# Altium PCB Noise_Gate_PCB.PcbDoc
Units mil, origin at the board's own origin, x right, y up, seen from the top; angles counter-clockwise.
Board outline 6000 x 4000 mil, 2 copper layers (Top Layer, Bottom Layer); 48 components, 26 nets, 146 pads, 2 vias.
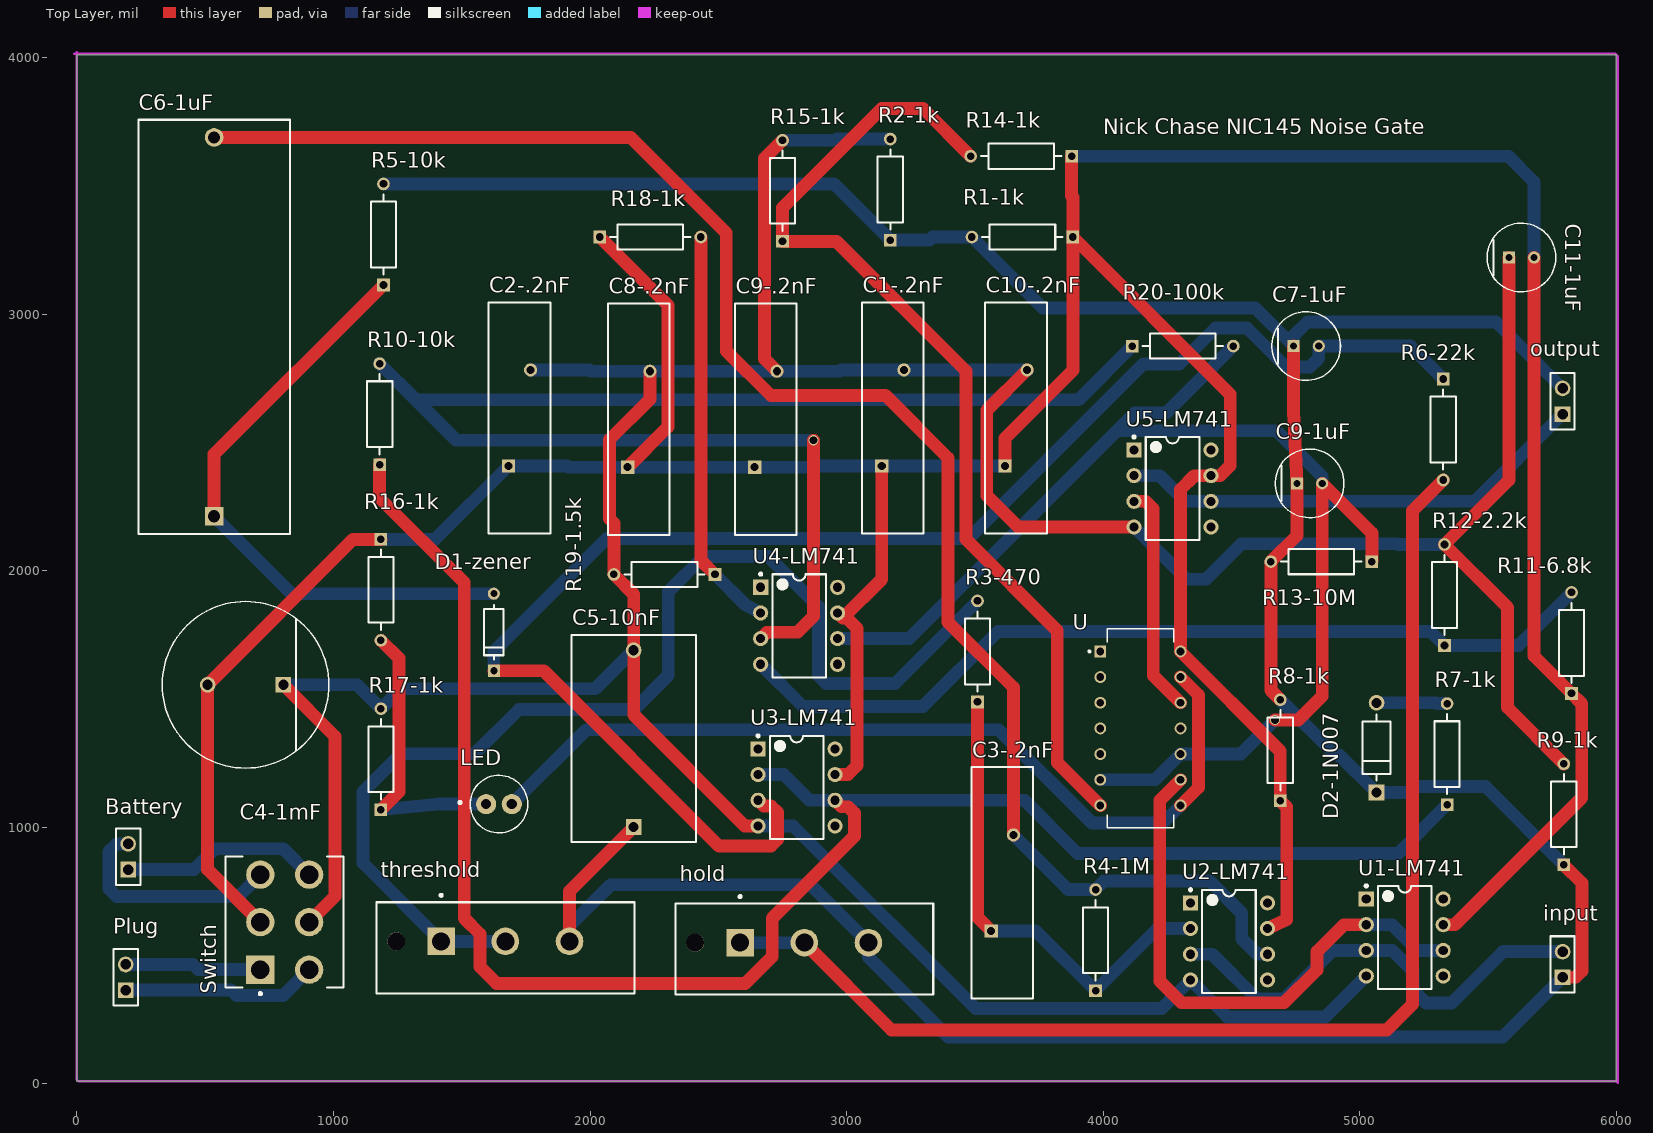
[diagram p0: Top Layer view]
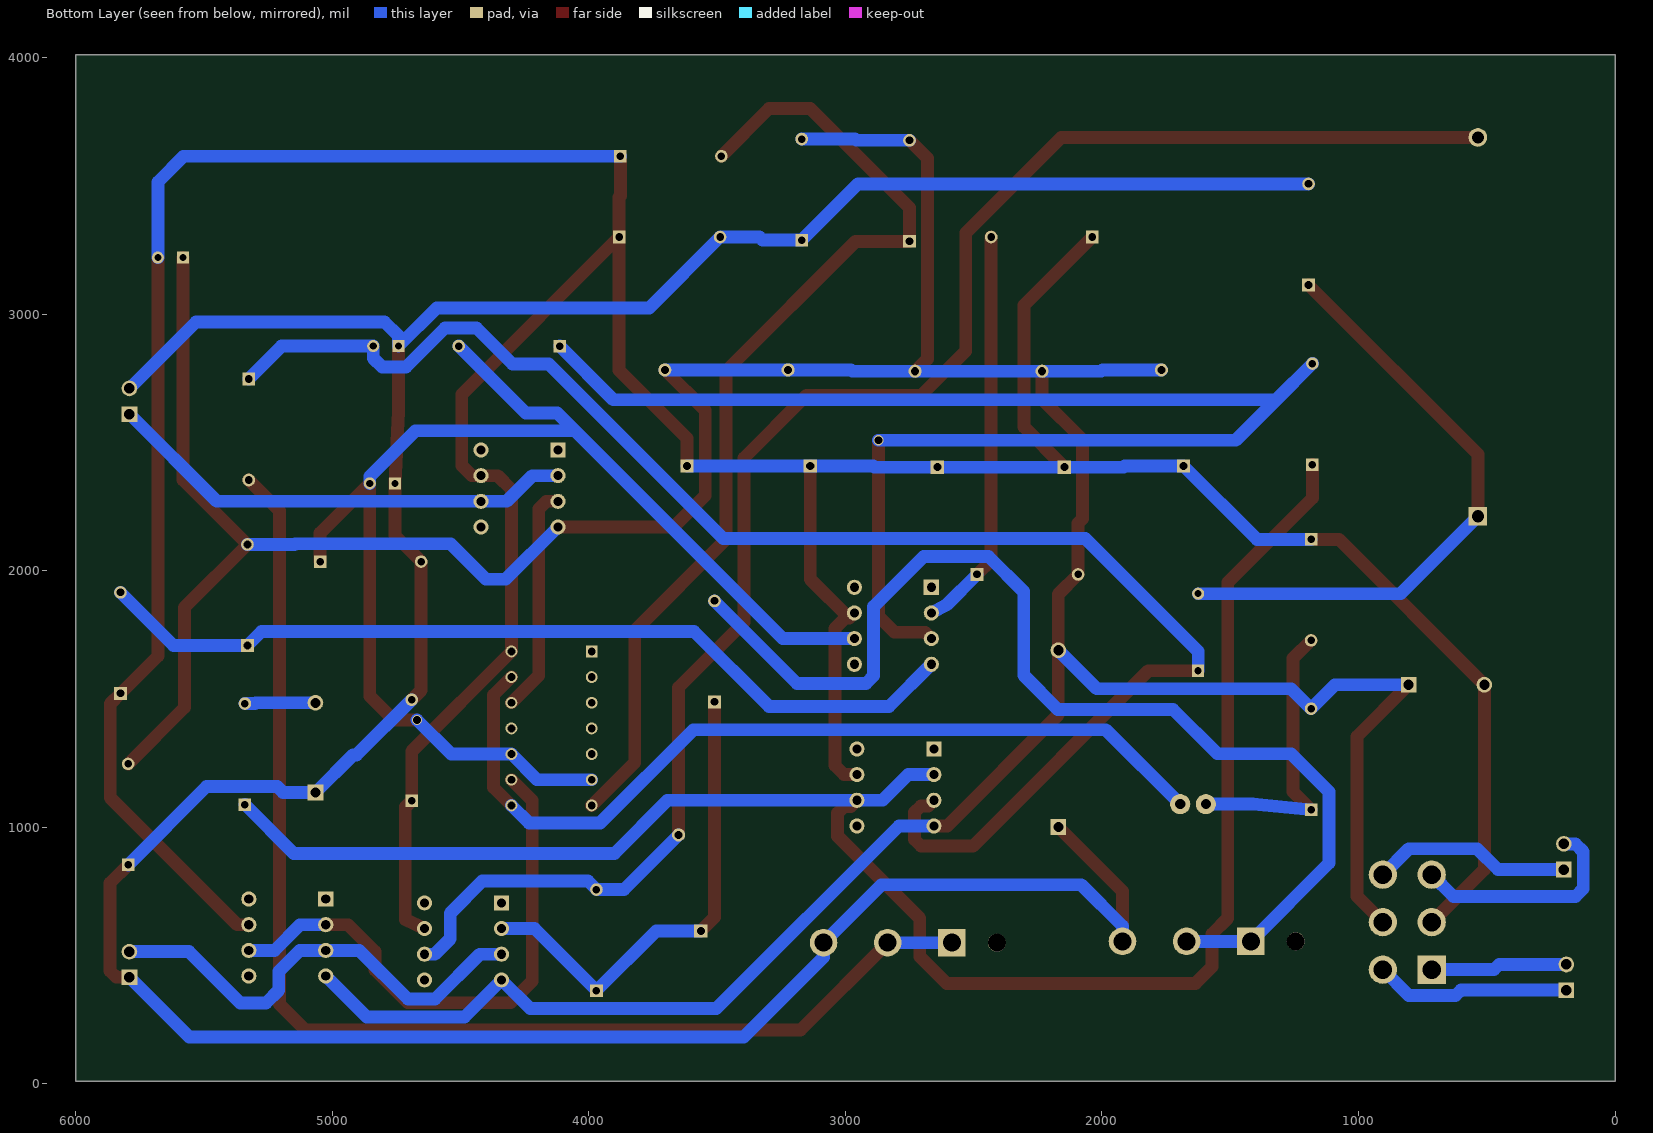
[diagram p1: Bottom Layer view, seen from below]
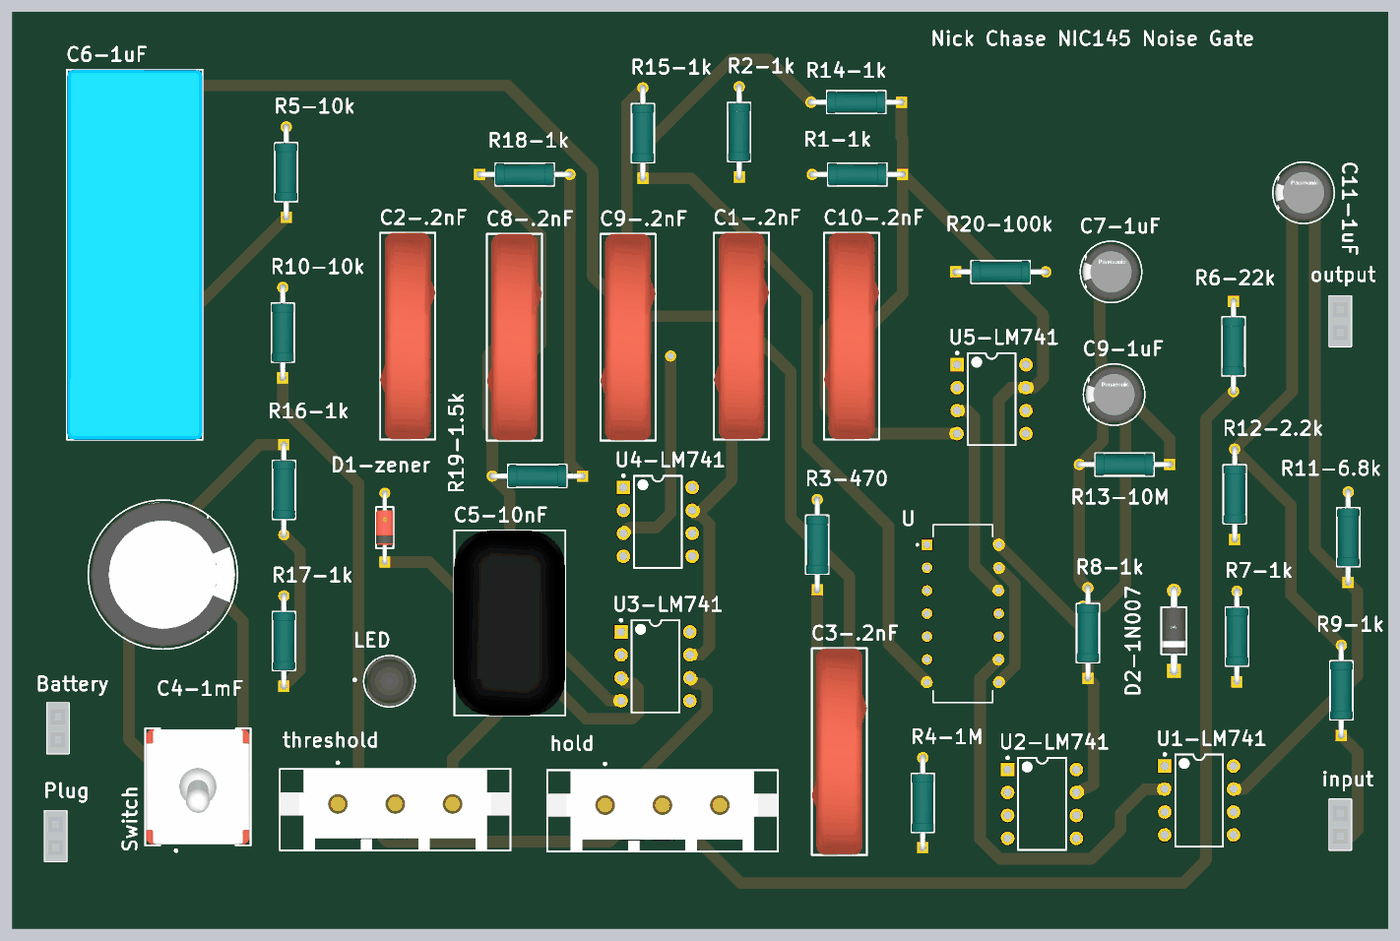
[diagram p2: 3D render of the assembled board from above, using the file's embedded part models]

## Layer stack, top to bottom
Top Solder: solder mask 0.4, Solder Resist, Dk 3.5
Top Layer: signal copper 1.4
Dielectric 1: dielectric 12.6, FR-4, Dk 4.8
Bottom Layer: signal copper 1.4
Bottom Solder: solder mask 0.4, Solder Resist, Dk 3.5

## Board outline
0,10 6000,10 6000,4010 0,4010

## Design rules (kind name [scope] priority, off if disabled: settings)
BoardOutlineClearance [All] p1: gap=7.87 ignorepadtopadclearanceinfootprint=FALSE except(15.75: Arc-SplitBarrior Arc-SplitContinuation Track-SplitBarrior Track-SplitContinuation SMDPad-SplitBarrior SMDPad-SplitContinuation THPad-SplitBarrior THPad-SplitContinuation Via-SplitBarrior Via-SplitContinuation Fill-SplitBarrior Fill-SplitContinuation Poly-SplitBarrior Poly-SplitContinuation Region-SplitBarrior Region-SplitContinuation Text-SplitBarrior Text-SplitContinuation)
Clearance "Clearance Bottom Layer" [OnLayer('Bottom Layer')] p1: gap=8 ignorepadtopadclearanceinfootprint=TRUE except(10: Arc-Text Track-Text SMDPad-Text THPad-Text Via-Text Fill-Text Poly-Text Region-Text Text-Text)
Clearance "Clearance Top Layer" [OnLayer('Top Layer')] p2: gap=8 ignorepadtopadclearanceinfootprint=TRUE except(10: Arc-Text Track-Text SMDPad-Text THPad-Text Via-Text Fill-Text Poly-Text Region-Text Text-Text)
Clearance [All] p3: gap=7.87 ignorepadtopadclearanceinfootprint=FALSE except(3.5: Arc-Arc Arc-Track Arc-SMDPad Track-Track Track-SMDPad SMDPad-SMDPad; 5: Arc-Via Track-Via SMDPad-Via THPad-Via Via-Via; 10: Arc-Text Track-Text SMDPad-Text THPad-Text Via-Text Fill-Text Poly-Text Region-Text Text-Text)
HoleSize [All] p1: absolutevalues=TRUE maxlimit=248.03 minlimit=7.87 maxpercent=80.000 minpercent=20.000
MinimumAnnularRing [All] p1: minimumring=3
MinimumSolderMaskSliver [All] p1: minsoldermaskwidth=3.94
PolygonConnect PolygonConnect_1 [All] p1: thpad.connectstyle=Relief thpad.reliefconductorwidth=20 thpad.reliefentries=4 thpad.polygonreliefangle="90 Angle" thpad.airgapwidth=10 smdpad.connectstyle=Relief smdpad.reliefconductorwidth=20 smdpad.reliefentries=4 smdpad.polygonreliefangle="90 Angle" smdpad.airgapwidth=10 via.connectstyle=Direct via.reliefconductorwidth=20 via.reliefentries=4 via.polygonreliefangle="90 Angle" via.airgapwidth=10
RoutingCorners [All] p1: cornerstyle=Round minsetback=100 maxsetback=100
RoutingVias [All] p1: holewidth=19.68 width=39.37 viastyle="Through Hole" minholewidth=7.87 minwidth=17.72 maxholewidth=39.37 maxwidth=78.74
SilkToSilkClearance [All] p1: silktosilkclearance=3.94
SilkToSolderMaskClearance [IsPad] p1: minsilkscreentomaskgap=3.94 clearancetoexposedcopper=TRUE
SolderMaskExpansion [All] p1: expansion=4 istentingtop=FALSE
Width [All] p1: maxlimit=100 minlimit=3.5 preferedwidth=15
25 further rules are at their usual default settings.

## Components (designator, comment, footprint, x,y, rotation, side; value= is the part's Value field where it differs from the comment)
Battery "9V-Power" SMTC-SSW-102-02-X-S 200,835 r90 top
C1-.2nF "" FP-565R30GASS33-MFG 3180,2595 r90 top
C2-.2nF "" FP-565R30GASS33-MFG 1725,2595 r90 top
C3-.2nF "" FP-565R30GASS33-MFG 3606.69,782.99 r90 top
C4-1mF "EEUFC1V102SB" FP-RAD-TH-D_16_0_5-L_20_2-MFG 657.36,1555 r180 top
C5-10nF "ECWF4754JL" FP-ECWF4754JL-MFG 2170,1345 r90 top value=0.75uF
C6-1uF "PHE844RR7100MR06L2" FP-PHE844RR7100MR06L2-MFG 535,2950 r90 top
C7-1uF "ECA-2CHG010I" FP-ECA-2CHG010I-MFG 4790.79,2875 r0 top
C8-.2nF "" FP-565R30GASS33-MFG 2190,2590 r90 top
C9-1uF "ECA-2CHG010I" FP-ECA-2CHG010I-MFG 4804.21,2340 r0 top
C9-.2nF "" FP-565R30GASS33-MFG 2685,2590 r90 top
C10-.2nF "" FP-565R30GASS33-MFG 3660,2595 r90 top
C11-1uF "ECA-2CHG010I" FP-ECA-2CHG010I-MFG 5630,3220 r0 top
D1-zener "1N5242BTR" FP-017AG-MFG 1625,1759.88 r90 top
D2-1N007 "1N4007" FP-1N4007-MFG 5065,1310 r90 top value=15pF
hold "" FP-641966-1-MFG 2835,525 r0 top
input "in" SMTC-SSW-102-02-X-S 5790,415 r90 top
LED "SFH 4554" FP-SFH_4554-MFG 1645,1090 r0 top
output "out" SMTC-SSW-102-02-X-S 5790,2610 r90 top
Plug "9V-Power" SMTC-SSW-102-02-X-S 190,365 r90 top
R1-1k "R1" FP-MRS25-MFG 3685,3300 r180 top
R2-1k "R2" FP-MRS25-MFG 3170,3485 r90 top
R3-470 "R3" FP-MRS25-MFG 3510,1685 r90 top
R4-1M "R3" FP-MRS25-MFG 3970,560 r90 top
R5-10k "R3" FP-MRS25-MFG 1195,3310 r90 top
R6-22k "R3" FP-MRS25-MFG 5325,2550 r270 top
R7-1k "R3" FP-MRS25-MFG 5340,1285 r90 top
R8-1k "R1" FP-MRS25-MFG 4690,1300 r90 top
R9-1k "R2" FP-MRS25-MFG 5795,1050 r90 top
R10-10k "R2" FP-MRS25-MFG 1180,2610 r90 top
R11-6.8k "R1" FP-MRS25-MFG 5825,1718.15 r90 top
R12-2.2k "R2" FP-MRS25-MFG 5330,1905 r90 top
R13-10M "R3" FP-MRS25-MFG 4850,2035 r180 top
R14-1k "R1" FP-MRS25-MFG 3680,3615 r180 top
R15-1k "R2" FP-MRS25-MFG 2750,3480 r90 top
R16-1k "R1" FP-MRS25-MFG 1185,1925 r270 top
R17-1k "R2" FP-MRS25-MFG 1185,1265 r90 top
R18-1k "R1" FP-MRS25-MFG 2235,3300 r0 top
R19-1.5k "R2" FP-MRS25-MFG 2290,1985 r180 top
R20-100k "R2" FP-MRS25-MFG 4310,2875 r0 top
Switch "On/Off" FP-100DP1T2B3M2QEH-MFG 810.08,630 r90 top
threshold "" FP-641966-1-MFG 1670,530 r0 top
U "CD4007UBE" DIP794W45P254L1969H508Q14 4145,1385 r0 top
U1-LM741 "LM741" P0008A 5175,570 r0 top
U2-LM741 "LM741" P0008A 4490,555 r0 top
U3-LM741 "LM741" P0008A 2805,1155 r0 top
U4-LM741 "LM741" P0008A 2815,1785 r0 top
U5-LM741 "LM741" P0008A 4270,2320 r0 top

## Footprints (in the part's own frame and the unit in brackets; to place one, negate y for a bottom-side part, rotate by r counter-clockwise, add the part's x,y. Pads: shape width x height; smd on the part's side, far side on the other; paste and mask are expansions set on the pad)
DIP794W45P254L1969H508Q14 [mm]
  rect 1.17x1.17 hole 0.77: 1(-3.97,7.62)
  round 1.17 hole 0.77: 2(-3.97,5.08) 3(-3.97,2.54) 4(-3.97,0) 5(-3.97,-2.54) 6(-3.97,-5.08) 7(-3.97,-7.62) 8(3.97,-7.62) 9(3.97,-5.08) 10(3.97,-2.54) 11(3.97,0) 12(3.97,2.54) 13(3.97,5.08) 14(3.97,7.62)
  silkscreen extent -5.15,-9.84 3.3,9.84
FP-1N4007-MFG [mm]
  rect 1.55x1.55 hole 1 paste-2539.97 mask+0: 1(-4.44,0)
  round 1.55 hole 1 paste-2539.97 mask+0: 2(4.44,0)
  silkscreen extent -3.27,-1.4 3.27,1.4, body extent -5.32,-1.5 5.32,1.5, height 0.25
FP-017AG-MFG [mm]
  rect 1.2x1.2 hole 0.7 paste-2539.97 mask+0: 1(-3.813,0)
  round 1.2 hole 0.7 paste-2539.97 mask+0: 2(3.813,0)
  silkscreen extent -2.68,-0.95 2.68,0.95, body extent -4.51,-1.05 4.51,1.05, height 0.25
FP-100DP1T2B3M2QEH-MFG [mm]
  rect 2.8x2.8 hole 1.85 paste-2539.97 mask+0: 1(-4.7,2.415)
  round 2.8 hole 1.85 paste-2539.97 mask+0: 2(0,2.415) 3(4.7,2.415) 4(-4.7,-2.415) 5(0,-2.415) 6(4.7,-2.415)
  silkscreen extent -7.2,-5.84 6.48,5.84, body extent -6.58,-5.94 6.58,5.94, height 0.25
FP-565R30GASS33-MFG [mm]
  rect 1.3x1.3 hole 0.8 paste-2539.97 mask+0: 1(-4.75,1.1)
  round 1.3 hole 0.8 paste-2539.97 mask+0: 2(4.75,-1.1)
  silkscreen extent -11.45,-3.05 11.45,3.05, body extent -11.55,-3.15 11.55,3.15, height 0.25
FP-641966-1-MFG [mm]
  rect 2.73x2.73 hole 1.78 paste-2539.97 mask+0: 1(-6.35,0.635)
  round 2.73 hole 1.78 paste-2539.97 mask+0: 2(0,0.635) 3(6.35,0.635)
  round 1.78 hole 1.78 unplated paste-2539.97 mask+0: ""(-10.8,0.635)
  silkscreen extent -12.77,-4.51 12.77,5.32, body extent -12.86,-4.61 12.87,4.61, height 0.25
FP-ECA-2CHG010I-MFG [mm]
  rect 1.2x1.2 hole 0.7 paste-2539.97 mask+0: 1(-1.25,0)
  round 1.2 hole 0.7 paste-2539.97 mask+0: 2(1.25,0)
  silkscreen extent -3.4,-3.4 3.4,3.4, body extent -3.5,-3.5 3.5,3.5, height 0.25
FP-ECWF4754JL-MFG [mm]
  rect 1.55x1.55 hole 1 paste-2539.97 mask+0: 1(-8.75,0)
  round 1.55 hole 1 paste-2539.97 mask+0: 2(8.75,0)
  silkscreen extent -10.25,-6.15 10.25,6.15, body extent -10.35,-6.25 10.35,6.25, height 0.25
FP-MRS25-MFG [mm]
  rect 1.25x1.25 hole 0.75 paste-2539.97 mask+0: 1(-5,0)
  round 1.25 hole 0.75 paste-2539.97 mask+0: 2(5,0)
  silkscreen extent -3.97,-1.25 3.97,1.25, body extent -5.72,-1.35 5.72,1.35, height 0.25
FP-PHE844RR7100MR06L2-MFG [mm]
  rect 1.85x1.85 hole 1.2 paste-2539.97 mask+0: 1(-18.75,0)
  round 1.85 hole 1.2 paste-2539.97 mask+0: 2(18.75,0)
  silkscreen extent -20.5,-7.5 20.5,7.5, body extent -20.6,-7.6 20.6,7.6, height 0.25
FP-RAD-TH-D_16_0_5-L_20_2-MFG [mm]
  rect 1.55x1.55 hole 1 paste-2539.97 mask+0: 1(-3.75,0)
  round 1.55 hole 1 paste-2539.97 mask+0: 2(3.75,0)
  silkscreen extent -8.25,-8.25 8.25,8.25, body extent -8.35,-8.35 8.35,8.35, height 0.25
FP-SFH_4554-MFG [mm]
  round 2 hole 1 paste-2539.97 mask+0: 1(-1.27,0) 2(1.27,0)
  silkscreen extent -3.97,-2.85 2.85,2.85, body extent -2.95,-2.95 2.95,2.95, height 0.25
P0008A [mm] "DIP, 8-Leads, Body 10.15x6.6mm, Pitch 2.54mm"
  rect 1.5x1.5 hole 0.9: 1(-3.81,3.81)
  round 1.5 hole 0.9: 2(-3.81,1.27) 3(-3.81,-1.27) 4(-3.81,-3.81) 5(3.81,-3.81) 6(3.81,-1.27) 7(3.81,1.27) 8(3.81,3.81)
  silkscreen extent -3.93,-5.1 2.65,5.23, body extent -3.95,-5.07 3.95,5.07, height 5.08
SMTC-SSW-102-02-X-S [mm] "SQ Post Socket, 1x2 Pins, Vertical, 2.54mm Pitch, Female"
  rect 1.55x1.55 hole 1.04: 1(0,0)
  round 1.55 hole 1.04: 2(2.54,0)
  silkscreen extent -1.53,-1.2 4.07,1.2, body extent -1.52,-1.21 4.06,1.21, height 8.51

## Part data
Battery input output Plug: library part CMP-1023-00323-1, "SQ Post Socket, Through-hole, Vertical, -55 to 105 degC, 2.54 mm Pitch, 2-Pin, Female, RoHS", Manufacturer=Samtec, PartNumber=SSW-102-02-T-S, Temperature Range="-55 to 105 degC", ComponentLink1Description="Manufacturer URL", ComponentLink1URL=http://www.samtec.com, ComponentLink2Description=Datasheet, ComponentLink2URL=http://www.samtec.com/documents/webfiles/pdf/SSW_TH.PDF, ComponentLink3Description="Package Specification", ComponentLink3URL=http://www.samtec.com/documents/webfiles/cpdf/SSW-1XX-XX-XXX-X-XX-XXX-XX-MKT.pdf, DatasheetVersion=F-214, Mounting Technology=Through-hole, Orientation=Vertical, PackageDescription="Assembly, Socket Strip .016 X .031 Tail", PackageReference=SSW-102-02-X-S, PackageVersion="CA, 6/1987", Pitch="2.54 mm", RoHS=True
C1-.2nF C2-.2nF C3-.2nF C8-.2nF C9-.2nF C10-.2nF: library part CMP-00030-41968055-1, "565R30GASS33 33nF 3 kV dc Ceramic Single Layer Capacitor; Z5U Dielectric Radial 565R Series", Capacitance=33nF, Case/Package=Radial, Dielectric=Z5U, Max Operating Temperature=105°C, Min Operating Temperature=-25°C, Tolerance=20%, Voltage=3kV, Composition=Ceramic, Depth=6.1mm, Diameter=22.9mm, Height=22.9mm, Lead Diameter=640µm, Lead Free="Lead Free", Lead Pitch=9.52mm, Material=Ceramic, Mount=Radial, NexarPartId=41968055, Packaging=Bulk, RoHS=Compliant, Schedule B=8532230060, Termination=Radial, Voltage Rating=3kV, Voltage Rating (DC)=3kV
C4-1mF: library part CMP-05427-002178-1, "Aluminum Electrolytic Capacitors (Radial Lead Type) AEC-Q200 Qualified 1000uF ±20% 35V", Capacitance=1mF, Case/Package=Radial, ESR (Equivalent Series Resistance)=29mR, Max Operating Temperature=105°C, Min Operating Temperature=-55°C, Package Quantity=250, Ratings=AEC-Q200, Ripple Current=2.205A, Tolerance=20%, Voltage Rating=35V, Contact Plating=Tin, Diameter=16mm, Height=20mm, Height - Seated (Max)=1.063inch, Impedance=29mR, Lead Diameter=0.8mm, Lead Pitch=7.5mm, Length=20mm, Life (Hours)=5000Hour, Mount="Through Hole", Packaging="Tape and Reel", Polarity=Polar, Radiation Hardening=No, RoHS Compliant=Yes, Series=FC, Termination=Radial, Voltage Rating (DC)=35V
C5-10nF: library part CMP-05434-000002-1, "CAP FILM 0.75UF 5% 400VDC RADIAL", Capacitance=0.75uF, Manufacturer="Panasonic Electronic Components", Temperature="-40°C to +105°C", Temperature Range High=+105°C, Temperature Range Low=-40°C, Tolerance=5%, Voltage Rating=400V, Automotive=No, Category=Cap, ComponentLink2Description=Datasheet, ComponentLink2URL=https://industrial.panasonic.com/cdbs/www-data/pdf/RDI0000/ABD0000C245.pdf, Device Class L1="Passive Components", Device Class L2=Capacitors, Device Class L3="Film Capacitors", Digikey Description="CAP FILM 0.75UF 5% 400VDC RADIAL", Height=20.6mm, Ipc Land Pattern Name=CAPAD1750W100L2050D1230, Lead Free=Yes, Manufacturer Part Number=ECWF4754JL, Material="Plastic Film", Octopart=https://octopart.com/ecw-f4754jl-panasonic-39488642, Package=ECWF4754JL, RoHS=TRUE, Standoff Height=1.5mm
C6-1uF: library part CMP-03022-000020-1, "CAP FILM 1UF 20% 1KVDC RADIAL", Capacitance=1uF, Case/Package=Radial, Dielectric=PP, Max Operating Temperature=105°C, Min Operating Temperature=-40°C, Tolerance=20%, Voltage Rating (AC)=440V, Voltage Rating (DC)=1kV, Construction=RADIAL, Depth=15mm, Dielectric Material=PP, Height=21mm, Height - Seated (Max)=1.024inch, Lead Diameter=1mm, Lead Pitch=37.5mm, Length=41mm, Mount="Through Hole", Packaging=Tray, Radiation Hardening=No, REACH SVHC="No SVHC", RoHS Compliant=Yes, Series=PHE844, Termination=Radial, Width=0.61inch
C7-1uF C9-1uF C11-1uF: library part CMP-05427-002176-1, "CAP ALUM 1UF 20% 160V RADIAL", Capacitance=1uF, Case/Package=Radial, Max Operating Temperature=105°C, Min Operating Temperature=-25°C, Package Quantity=2000, Ripple Current=17mA, Tolerance=20%, Voltage Rating=160V, Diameter=6.3mm, Height=11.2mm, Height - Seated (Max)=0.48inch, Lead Pitch=2.5mm, Lead/Base Style=Straight, Length=11.2mm, Life (Hours)=2000Hour, Mount="Through Hole", Packaging="Ammo Pack", Radiation Hardening=No, RoHS Compliant=Yes, Series=NHG, Termination=Radial, Voltage Rating (DC)=160V
D1-zener: library part CMP-00278-84408833-1, "1N5242BTR 1N5242 Series 500 mW 12 V 200 mA Through Hole Zener Diode - DO-35", Forward Voltage=1.2V, Manufacturer Lifecycle Status=ACTIVE, Max Operating Temperature=200°C, Max Power Dissipation=500mW, Max Reverse Leakage Current=100nA, Min Operating Temperature=-65°C, Peak Reverse Current=1µA, Test Current=20mA, Tolerance=5%, Voltage Rating (DC)=12V, Contact Plating=Tin, Diameter=1.91mm, Element Configuration=Single, ESD Protection=No, Height=6.35mm, Impedance=30Ω, Lead Free="Lead Free", Length=4.56mm, Lifecycle Status=Production, Mount="Through Hole", NexarPartId=84408833, Number of Pins=2, Packaging="Cut Tape (CT)", Power Dissipation=500mW, Power Rating=500mW, Radiation Hardening=No, REACH SVHC="No SVHC", RoHS=Compliant, Schedule B="8541100050, 8541100050", Voltage Tolerance=5%, Weight=80g, Width=6.35mm, Working Voltage=12V, Zener Current=20mA, Zener Voltage=12V
D2-1N007: library part CMP-123542-000001-1, "Rectifier diode 1000 V 1 A DO-41, ,", Capacitance=15pF, Forward Current=1A, Manufacturer=Diotec, Max Junction Temp=+175°C, Max Repetitive Reverse Voltage=1000V, Max Surge Forward Current=27A, Peak Reverse Current=5uA, Temperature="-50°C to +175°C", Temperature Range Low=-50°C, Automotive=No, Category=Diode, ComponentLink2Description=Datasheet, ComponentLink2URL=https://datasheet.octopart.com/1N4007-Diotec-datasheet-62346875.pdf, Device Class L1="Discrete Semiconductors", Device Class L2=Diodes, Device Class L3="Rectifier Diodes", Height=2.8mm, Ipc Land Pattern Name=DIOAD888W100L520D280, Lead Free=Yes, Manufacturer Part Number=1N4007, Octopart=https://octopart.com/1n4007-diotec-4040411, Package=1N4007, Reverse Voltage=1000V, RoHS=TRUE, Temperature Range High=+175°C
hold threshold: library part CMP-03369-000088-1, "CONN HEADER VERT 3POS 6.35MM", Current Rating=19A, Manufacturer=TE, Manufacturer Part Number=641966-1, Temperature="-55°C to +105°C", Temperature Range High=+105°C, Temperature Range Low=-55°C, Voltage Rating=600V, Automotive=No, Category=Conn, ComponentLink2Description=Datasheet, ComponentLink2URL=https://www.te.com/usa-en/product-641966-1.html?te_bu=Cor&te_type=other&te_campaign=oct_glo_cor-oct-global-oth-prtnr-fy19-oct-octo-buy-bom_sma-298_2&elqCampaignId=35216, Conn Gender=Male, Conn Orientation=Vertical, Contact Material=Tin, Device Class L1=Connectors, Device Class L2="Headers and Wire Housings", Device Class L3=unset, Digikey Description="CONN HEADER VERT 3POS 6.35MM", Footprint Url=https://www.te.com/commerce/DocumentDelivery/DDEController?Action=showdoc&DocId=Customer+Drawing%7F641966%7FP1%7Fpdf%7FEnglish%7FENG_CD_641966_P1.pdf%7F641966-1, Height=14.99mm, Lead Free=Yes, Mouser Description="Pin & Socket Connectors 3POS VERT MATE-N-LOK", Number Of Contacts=3, Octopart=https://octopart.com/641966-1-te+connectivity-46507674, Package=641966-1, Pitch=6.35mm, RoHS=TRUE, Standoff Height=0.63mm
LED: library part CMP-62016-000002-1, "EMITTER IR 850NM", Colour=Infrared, Forward Current=100mA, Forward Voltage=1.7V, Manufacturer="Osram Opto", Package=SFH_4554, Power Dissipation=200mW, Reverse Voltage=5V, Temperature="-40°C to +100°C", Temperature Range High=+100°C, Temperature Range Low=-40°C, Automotive=No, Category=Diode, ComponentLink2Description=Datasheet, ComponentLink2URL=https://forum.upverter.com/uploads/short-url/9WLvpCRBrQtL1CWwnUt39ojzKI8.pdf, Device Class L1=Optoelectronics, Device Class L2=LEDs, Device Class L3=unset, Digikey Description="EMITTER IR 850NM", Lead Free=Yes, Led Orientation=Straight, Manufacturer Part Number="SFH 4554", Mouser Description="Infrared Emitter 850nm 550mW/sr Circular Top Mount 2-Pin T-1 3/4", Octopart=https://octopart.com/sfh+4554-osram+opto-55819455, Peak Emmision Wavelength=860nm, RoHS=TRUE, Viewing Angle=20°
R1-1k R2-1k R3-470 R4-1M R5-10k R6-22k R7-1k R8-1k R9-1k R10-10k R11-6.8k R12-2.2k R13-10M R14-1k R15-1k R16-1k R17-1k R18-1k R19-1.5k R20-100k: library part CMP-02408-000051-1, "RES 1K OHM 0.6W 1% AXIAL", Case/Package=Axial, Max Operating Temperature=155°C, Max Power Dissipation=600mW, Min Operating Temperature=-55°C, Package Quantity=5000, Resistance=1kR, Resistance Tolerance=1%, Resistor Type="Metal Film", Temperature Coefficient=50ppm/°C, Voltage Rating=350V, Construction=Cylindrical, Contact Plating=Tin, Diameter=2.5mm, Lead Diameter=0.6mm, Lead Free="Lead Free", Length=6.5mm, Military Standard=Not, Mount="Through Hole", Number of Pins=2, Number of Terminations=2, Packaging="Tape and Reel", Power Rating=600mW, Radiation Hardening=No, RoHS Compliant=Yes, Series=MRS25, Technology="THIN FILM", Termination=Axial, Tolerance=1%, Voltage Rating (DC)=350V, Weight=0.00776oz, Width=2.5mm
Switch: library part CMP-17880-000002-1, "SWITCH TOGGLE NON ILLUMINATED", Contact Current Rating=5A, Contact Resistance=10mΩ, Manufacturer=E-Switch, Manufacturer Part Number=100DP1T2B3M2QEH, Package=0, Temperature="-30°C to +85°C", Temperature Range High=+85°C, Temperature Range Low=-30°C, Voltage Rating Ac=120V, Voltage Rating Dc=28V, Automotive=No, Category=Switch, ComponentLink2Description=Datasheet, ComponentLink2URL=http://spec_sheets.e-switch.com/specs/ST121094.pdf, Device Class L1=Electromechanical, Device Class L2=Switches, Device Class L3="Toggle Switches", Digikey Description="SWITCH TOGGLE NON ILLUMINATED", Electromechanical Life=40000Cycles, Footprint Url=http://spec_sheets.e-switch.com/specs/ST121094.pdf, Height=23.6mm, Lead Free=Yes, Mount="Through Hole", Mouser Description="Toggle Switches 5A 120VAC/28VDC On-None-On PC Mnt", Octopart=https://octopart.com/100dp1t2b3m2qeh-e-switch-7054946, RoHS=TRUE, Throw Configuration=DPDT
U: "CMOS dual complementary pair plus inverter 14-PDIP -55 to 125", Package="PDIP-14 Texas Instruments", Availability=Unavailable, MF="Texas Instruments", MP=CD4007UBE, Price=None, SnapEDA_Link=https://www.snapeda.com/parts/CD4007UBE/Texas%20Instruments/view-part/2816072/?ref=snap, Texas_Instruments-Purchase-URL=https://snapeda.com/shop?store=Texas+Instruments&id=2816072
U1-LM741 U2-LM741 U3-LM741 U4-LM741 U5-LM741: library part CMP-0055-00162-3, "Operational Amplifier, 8-pin MDIP, Pb-Free", Manufacturer="Texas Instruments", Package Reference=P0008A, PackageTopMarking=NSUZXYTTE#*LM*741CN, PowerWise=N, Code_JEDEC=MS-001-BA, ComponentLink1Description="Datasheet URL", ComponentLink1URL=http://www.ti.com/general/docs/lit/getliterature.tsp?genericPartNumber=LM741&fileType=pdf, CompType=Amplifiers, PackageDescription="MDIP, .365 x .250 x .130in, 8 Lead, .100in Pitch", PinCount=8, RoHS=Y

## Via types
v1: diameter 40, hole 30, Top Layer to Bottom Layer, 2 vias

## Nets (pads, with @x,y where several pads share a name; then routed paths per layer and width w, separated by ;. In a path a pad name is that pad's centre, name@x,y a point inside that pad or via, vN(x,y) a via of type N, cw(c..) or ccw(c..) an arc to the next point about the centre after c; other vN are vias at no path point)
9V: C1-.2nF.1 C2-.2nF.1 C4-1mF.2 C8-.2nF.1 C9-.2nF.1 C10-.2nF.1 C11-1uF.2 R1-1k.1 R8-1k.1 R11-6.8k.1 R14-1k.1 R16-1k.1 R18-1k.1 Switch.2 U1-LM741.7 U2-LM741.7 U3-LM741.7 U4-LM741.7 U5-LM741.7 U.14 | length 16628.5
  Top Layer w50: Switch.2 509.72,835.28 C4-1mF.2 1076.57,2121.85 R16-1k.1 ; R18-1k.1 2304,3034.15 2304,2560.3 C8-.2nF.1 ; U3-LM741.7 3005,1205 3040,1240 3040,1775 3000,1815 U4-LM741.7@2985,1815 ; U4-LM741.7 U4-LM741.7@2985,1815 ; C1-.2nF.1 3136.69,1966.69 U4-LM741.7@2985,1815 ; C10-.2nF.1 3616.69,2516 3881.85,2781.16 R1-1k.1 ; R14-1k.1 3876.85,3460 3881.85,3455 R1-1k.1 ; U2-LM741.7 4715,640 4715,1078.15 R8-1k.1 4690,1296.3 U.14 4301.3,2316.3 4355,2370 U5-LM741.7 4455,2370 4495,2410 4495,2686.85 R1-1k.1 ; U1-LM741.7 5370,620 5865,1115 5865,1481.3 R11-6.8k.1 5679.21,1667.09 C11-1uF.2
  Bottom Layer w50: R16-1k.1 1395.55,2121.85 C2-.2nF.1 1911,2407.99 1916,2402.99 C8-.2nF.1 C9-.2nF.1 2886,2402.99 2891,2407.99 C1-.2nF.1 C10-.2nF.1 ; R14-1k.1 5579.21,3615 5679.21,3515 C11-1uF.2
Buff1Out: U1-LM741.2 U1-LM741.6 U.9 | length 2166.8
  Top Layer w50: U.9 4220,1103.7 4220,401 4305,316 4705,316 4833,444 4833,515 4938,620 U1-LM741.2
  Bottom Layer w50: U1-LM741.2 5125,620 5225,520 U1-LM741.6
Com: C5-10nF.1 C7-1uF.1 C9-1uF.1 D2-1N007.1 hold.3 input.1 output.2 R1-1k.2 R2-1k.1 R5-10k.2 R8-1k.2 R9-1k.1 R13-10M.2 threshold.3 | length 13313.2
  Top Layer w50: threshold.3 1920,750.51 C5-10nF.1 ; R8-1k.2 4653.15,1533.7 R13-10M.2 4755,2136.85 C9-1uF.1 4741.57,2620.43 C7-1uF.1 ; input.1 5841,415 5866,440 5866,782.15 R9-1k.1
  Bottom Layer w50: R5-10k.2 2951.3,3506.85 R2-1k.1 3323,3288.15 3334.85,3300 R1-1k.2 3764.32,3023.83 4592.74,3023.83 C7-1uF.1 4741.57,2915 4795.57,2969 5531,2969 output.2 ; threshold.3 1920,615 2081,776 2859,776 hold.3 3085,493.26 3396.26,182 5557,182 input.1 ; R8-1k.2 4904.85,1282 4918.2,1282 D2-1N007.1 5191,1135.2 5213.95,1158.15 5490,1158.15 R9-1k.1
CompOut: C9-1uF.2 R13-10M.1 R20-100k.2 U4-LM741.6 U.6 U.10 | length 5127.5
  Top Layer w50: v1(4669,1418) 4760,1418 4853.43,1511.43 C9-1uF.2 5046.85,2146.58 R13-10M.1
  Bottom Layer w50: U4-LM741.6 3244.13,1735 4054.13,2545 ; U.6 4201.3,1185 U.10 4536,1285 v1(4669,1418) ; R20-100k.2 4245.85,2614 4123.13,2614 4054.13,2545 ; C9-1uF.2 4853.43,2366.57 4675,2545 4054.13,2545
GND: C1-.2nF.2 C2-.2nF.2 C4-1mF.1 C5-10nF.2 C8-.2nF.2 C9-.2nF.2 C10-.2nF.2 C11-1uF.1 R2-1k.2 R9-1k.2 R12-2.2k.2 R15-1k.2 R17-1k.2 R19-1.5k.2 Switch.5 U1-LM741.4 U2-LM741.4 U3-LM741.4 U5-LM741.4 | length 15604.8
  Top Layer w50: C4-1mF.1 1006,1354 1006,730.84 Switch.5 ; C8-.2nF.2 2233.31,2668 2076,2510.69 2076,2202 2093.15,2184.85 R19-1.5k.2 2170,1908.15 C5-10nF.2 2170,1438 2603,1005 U3-LM741.4 ; C9-.2nF.2 2680,2825.32 2680,3606.85 R15-1k.2 ; C10-.2nF.2 3546,2624.7 3546,2293 3669,2170 U5-LM741.4 ; C11-1uF.1 5580.79,2352.64 R12-2.2k.2 5575,1856.85 5575,1466.85 R9-1k.2
  Bottom Layer w50: C4-1mF.1 1091.85,1555 R17-1k.2 1262.91,1539.76 2020.28,1539.76 C5-10nF.2 ; C2-.2nF.2 1998,2782.01 2003,2777.01 C8-.2nF.2 C9-.2nF.2 2973,2777.01 2978,2782.01 C1-.2nF.2 C10-.2nF.2 ; U3-LM741.4 2791,1005 3503,293 4228,293 U2-LM741.4 4484.53,260.47 4865.47,260.47 U1-LM741.4 ; R15-1k.2 2957,3676.85 2962,3681.85 R2-1k.2 ; U5-LM741.4 4324,1966 4400,1966 4539,2105 5144,2105 5147.15,2101.85 R12-2.2k.2
Input: input.2 U1-LM741.3 U2-LM741.3 | length 1811.3
  Bottom Layer w50: U2-LM741.3 4425,505 4599.53,330.47 4705,330.47 4894.53,520 U1-LM741.3 5126,520 5208,438 5208,365 5258,315 5358,315 5558,515 input.2
LEDOUT: LED.2 U.8 U.13 | length 3463
  Top Layer w50: U.8 4371.3,1155 4371.3,1515 U.13
  Bottom Layer w50: LED.2 1985,1380 3591.97,1380 3955,1016.97 4233.27,1016.97 U.8
NetBattery_1: Battery.1 Switch.6 | length 780.5
  Bottom Layer w50: Battery.1 457,835 538,916 804.2,916 Switch.6
NetBattery_2: Battery.2 Switch.3 | length 870.9
  Bottom Layer w50: Battery.2 155,935 124,904 124,761 155,730 629.96,730 Switch.3
NetC3-.2nF_1: C3-.2nF.1 R3-470.1 R4-1M.1 U2-LM741.2 | length 1887.5
  Top Layer w50: R3-470.1 3510,649.37 C3-.2nF.1
  Bottom Layer w50: C3-.2nF.1 3737.17,595.98 R4-1M.1 4211.85,605 U2-LM741.2
NetC3-.2nF_2: C3-.2nF.2 C6-1uF.2 R4-1M.2 U2-LM741.6 | length 6490.2
  Top Layer w50: C6-1uF.2 2158.81,3688.19 2531,3316 2531,2856 2705,2682 3152,2682 3395,2439 3395,1799 3650,1544 C3-.2nF.2
  Bottom Layer w50: C3-.2nF.2 3863.15,756.85 R4-1M.2 4003.15,790 4415,790 4540,665 4540,565 4600,505 U2-LM741.6
NetC6-1uF_1: C6-1uF.1 D1-zener.2 R5-10k.1 | length 2389.7
  Top Layer w50: C6-1uF.1 535,2453.15 R5-10k.1
  Bottom Layer w50: C6-1uF.1 836.81,1910 D1-zener.2
NetC7-1uF_2: C7-1uF.2 D1-zener.1 R6-22k.1 U3-LM741.3 | length 6073.3
  Top Layer w50: D1-zener.1 1819.24,1609.76 2502,927 2705,927 2730,952 2730,1058 2705,1083 2677,1083 U3-LM741.3
  Bottom Layer w50: D1-zener.1 1625,1685 2065,2125 3476,2125 4156,2805 4297,2805 4437,2945 4560,2945 4712,2793 4805,2793 4840,2828 C7-1uF.2 5196.85,2875 R6-22k.1
NetD2-1N007_2: D2-1N007.2 R7-1k.2 | length 276.2
  Bottom Layer w50: D2-1N007.2 5298.09,1484.8 5301.05,1481.85 R7-1k.2
Nethold_1: hold.1 hold.2 R6-22k.2 | length 4895.1
  Top Layer w50: hold.2 3175,210 5105,210 5205,310 5205,2233.15 R6-22k.2
  Bottom Layer w50: hold.1 hold.2
NetLED_1: LED.1 R16-1k.2 R17-1k.1 | length 1129
  Top Layer w50: R17-1k.1 1255,1138.15 1255,1658.15 R16-1k.2
  Bottom Layer w50: R17-1k.1 1411.85,1090 LED.1
Netoutput_1: output.1 U5-LM741.2 U5-LM741.6 | length 1852.3
  Bottom Layer w50: U5-LM741.2 4220,2370 4320,2270 U5-LM741.6 5450,2270 output.1
NetPlug_1: Plug.1 Switch.4 | length 765.7
  Bottom Layer w50: Plug.1 601,365 622,344 804.2,344 Switch.4
NetPlug_2: Plug.2 Switch.1 | length 533.3
  Bottom Layer w50: Plug.2 452,465 472.04,444.96 Switch.1
NetR3-470_2: R3-470.2 threshold.1 threshold.2 | length 4421.4
  Bottom Layer w50: threshold.2 threshold.1 1115,860 1115,1138 1263,1286 1550,1286 1723,1459 2172,1459 2305,1592 2305,1918 2442,2055 2694.53,2055 2890,1859.53 2890,1590 2920,1560 3188.15,1560 R3-470.2
NetR7-1k_1: R7-1k.1 R10-10k.1 U3-LM741.2 U3-LM741.6 | length 7006.7
  Top Layer w50: R10-10k.1 1180,2283.15 1510,1953.15 1510,645 1571,584 1571,456 1636,391 2605,391 2710,496 2710,645 3030,965 3030,1055 3005,1080 2980,1080 U3-LM741.6
  Bottom Layer w50: U3-LM741.2 2755,1205 2855,1105 U3-LM741.6 3692.64,1105 3899.64,898 5149.85,898 R7-1k.1
NetR10-10k_2: R10-10k.2 R20-100k.1 U4-LM741.3 | length 5621.7
  Top Layer w50: U4-LM741.3 2690,1760 2809,1760 2871,1822 v1(2871,2508)
  Bottom Layer w50: R10-10k.2 1320.85,2666 ; v1(2871,2508) 1478.85,2508 1320.85,2666 ; R20-100k.1 3904.15,2666 1320.85,2666
NetR11-6.8k_2: R11-6.8k.2 R12-2.2k.1 U4-LM741.4 | length 3458.1
  Bottom Layer w50: U4-LM741.4 2830,1470 3297,1470 3590,1763 5275.15,1763 R12-2.2k.1 5618.15,1708.15 R11-6.8k.2
NetR14-1k_2: R14-1k.2 R15-1k.1 U.7 | length 3935.5
  Top Layer w50: R14-1k.2 3297.15,3801 3137,3801 2750,3414 R15-1k.1 2959.85,3283.15 3465,2778 3465,2122 3821,1766 3821,1252.7 U.7
NetR18-1k_2: R18-1k.2 R19-1.5k.1 U4-LM741.2 | length 1572.8
  Top Layer w50: R18-1k.2 2431.85,2040 R19-1.5k.1
  Bottom Layer w50: R19-1.5k.1 2605,1866.85 U4-LM741.2
SigOut: U5-LM741.3 U.12 | length 886.5
  Top Layer w50: U5-LM741.3 4165,2270 4195,2240 4195,1591.3 U.12
pads on no net: hold. threshold. U1-LM741.1 U1-LM741.5 U1-LM741.8 U2-LM741.1 U2-LM741.5 U2-LM741.8 U3-LM741.1 U3-LM741.5 U3-LM741.8 U4-LM741.1 U4-LM741.5 U4-LM741.8 U5-LM741.1 U5-LM741.5 U5-LM741.8 U.1 U.2 U.3 U.4 U.5 U.11

## Keep-outs
Top Layer:
  lines w10: -10,4015 5995,4015 6005,4005 6005,5 6000,10 5,10 0,15 0,4020

## Silkscreen, mask and mechanical layers (free items; w line width, h text height)
Top Overlay:
  text "Nick Chase NIC145 Noise Gate" at 4000,3700 h60